# Altium PCB SpeakEasy_Logic.PcbDoc (part 1 of 2)
Units mil, origin at the board's own origin, x right, y up, seen from the top; angles counter-clockwise.
Board outline 3149.61 x 3149.61 mil, 2 copper layers (Top Layer, Bottom Layer), stack 62.8 mil thick; 87 components, 94 nets, 372 pads, 217 vias.
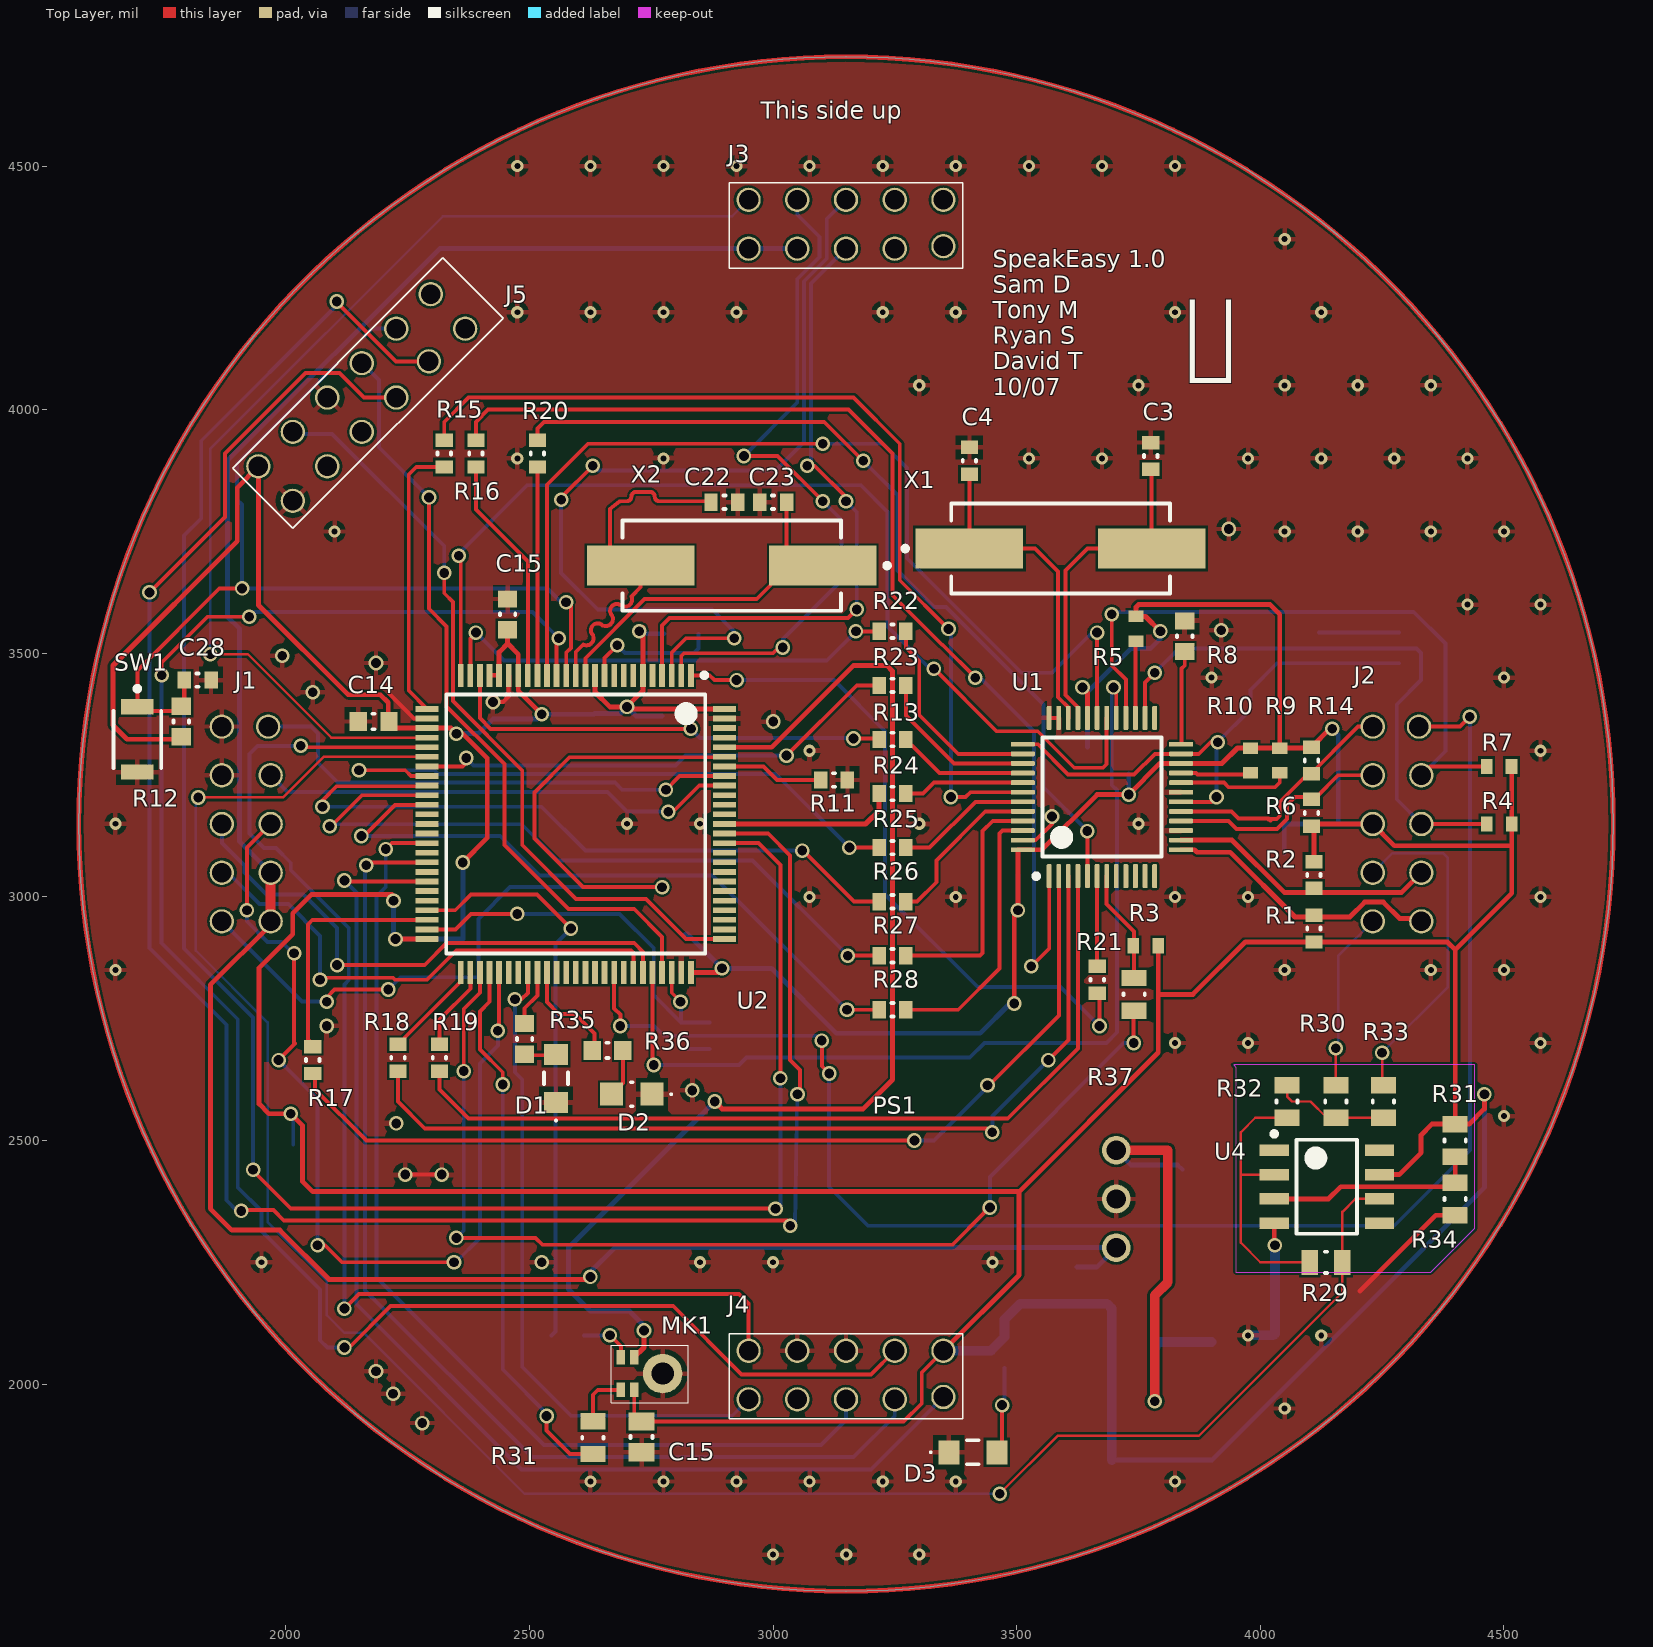
[diagram p0: Top Layer view]
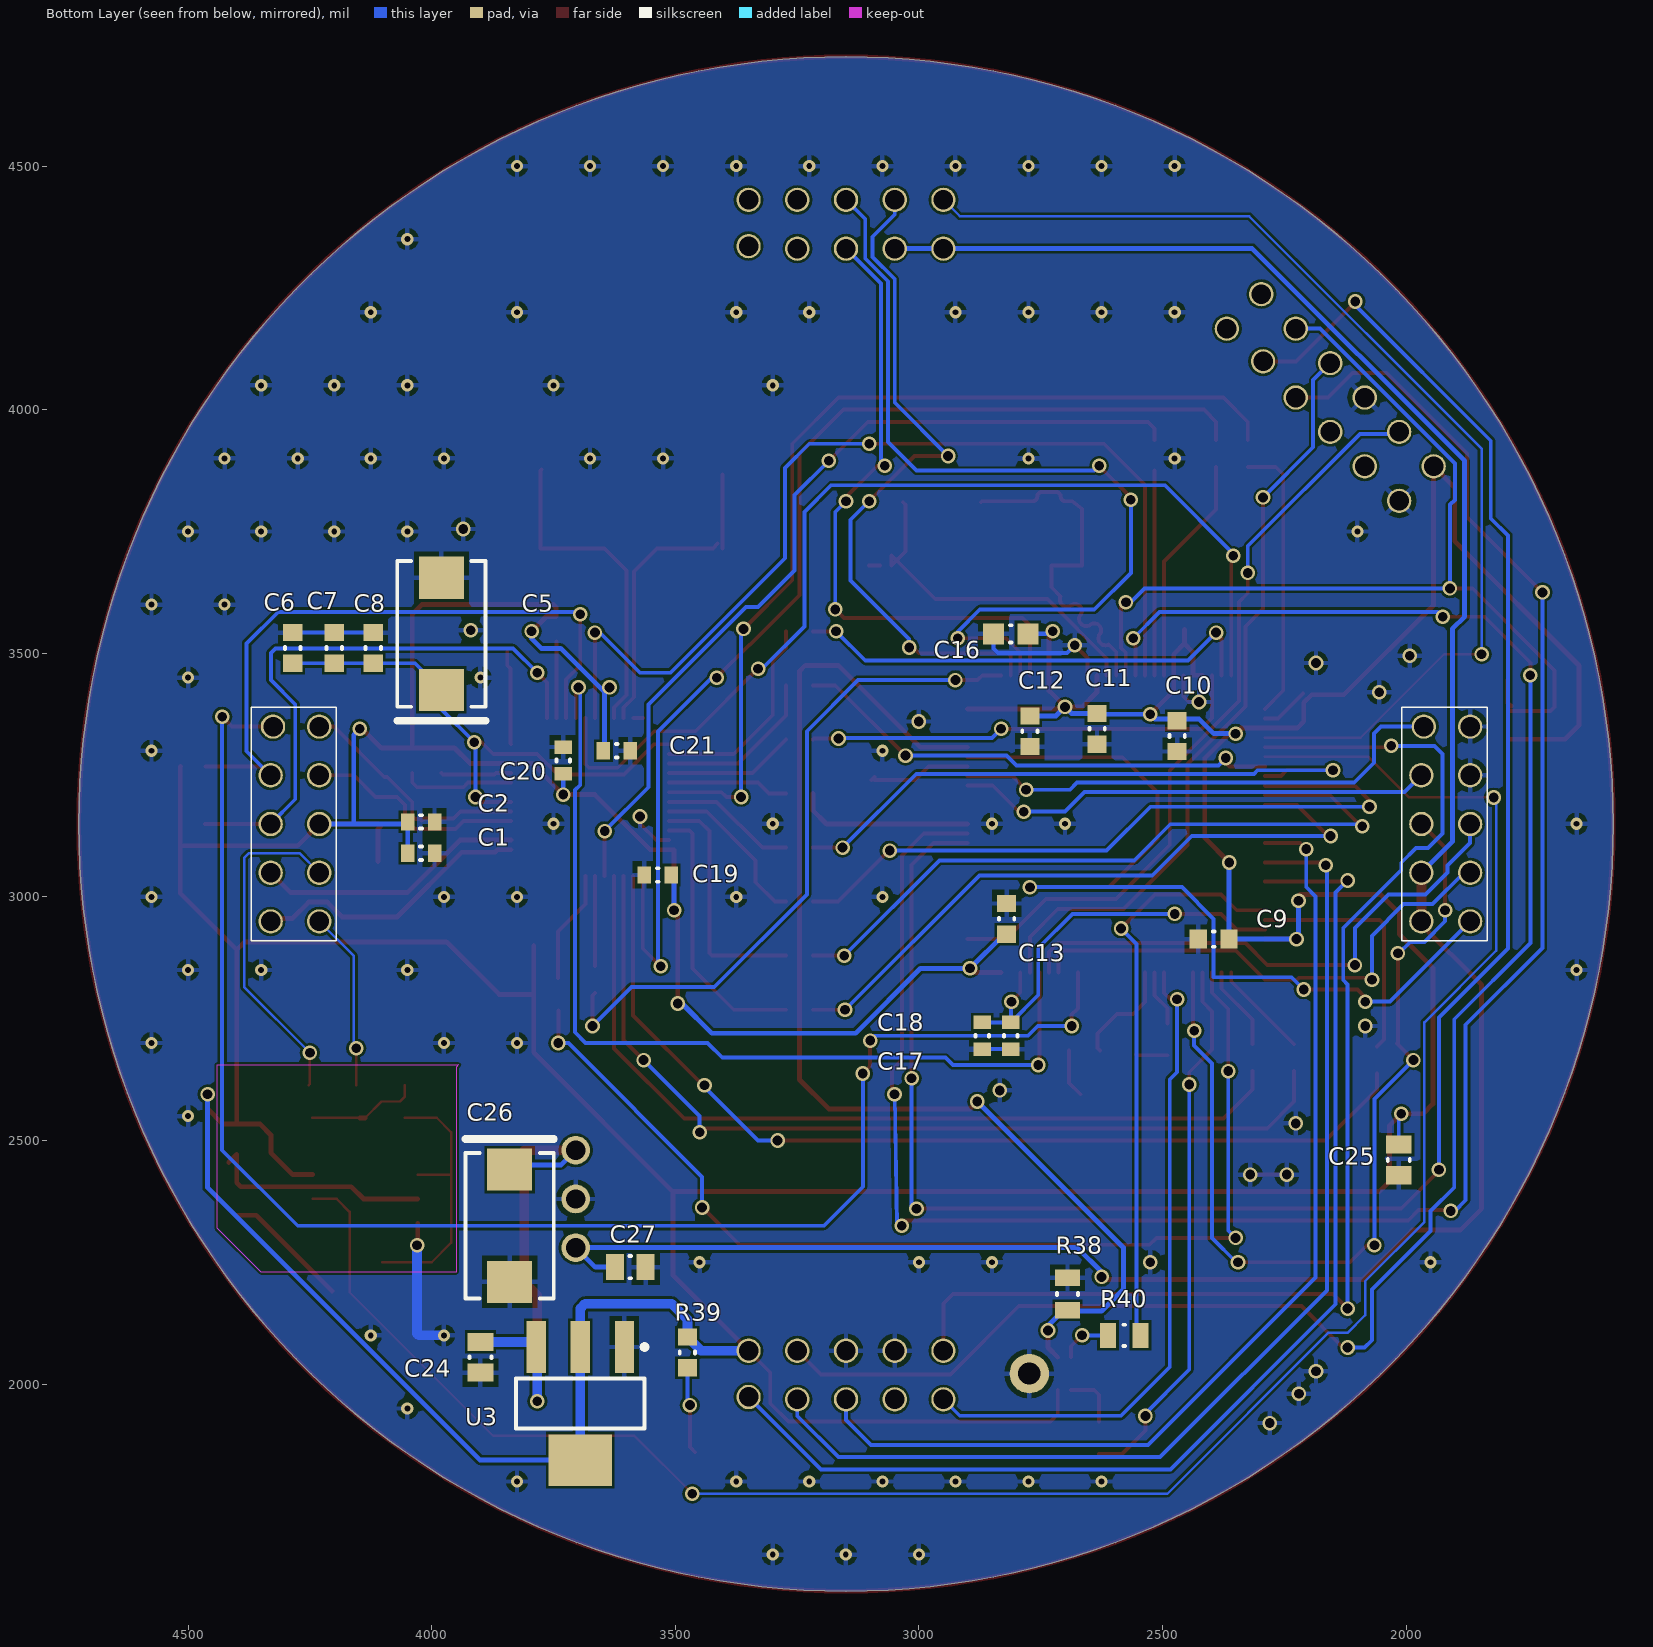
[diagram p1: Bottom Layer view, seen from below]

## Layer stack, top to bottom
Top Solder: solder mask 0.4, Solder Resist, Dk 3.5
Top Layer: signal copper 1.4
Dielectric 1: dielectric 60, FR-4, Dk 4.8
Bottom Layer: signal copper 1.4
Bottom Solder: solder mask 0.4, Solder Resist, Dk 3.5

## Board outline
3149.61,1574.8 cw(c3149.61,3149.61) 1574.8,3149.61 cw(c3149.61,3149.61) 3149.61,4724.41 cw(c3149.61,3149.61) 4724.41,3149.61 cw(c3149.61,3149.61)

## Design rules (kind name [scope] priority, off if disabled: settings)
Clearance [All] p1: gap=5 ignorepadtopadclearanceinfootprint=FALSE except(0: SMDPad-Hole THPad-Hole Via-Hole Fill-Hole Poly-Hole Region-Hole Text-Hole)
DiffPairsRouting [All] p1: maxlimit=10 minlimit=10 mostfreqgap=10 toplayer_minwidth=3.5 toplayer_maxwidth=15 toplayer_prefwidth=15 bottomlayer_minwidth=3.5 bottomlayer_maxwidth=15 bottomlayer_prefwidth=15 maxuncoupledlength=500
HoleSize [All] p1: absolutevalues=TRUE maxlimit=200 minlimit=7.87 maxpercent=80.000 minpercent=20.000
MatchedLengths [InNetClass('Xtal')] p1: tolerance=10 checknetsindiffpair=FALSE checkdiffpairvsdiffpair=TRUE checkxsignals=TRUE checkothers=TRUE
MinimumAnnularRing [All] p1: minimumring=3
MinimumSolderMaskSliver [All] p1: minsoldermaskwidth=1
PolygonConnect [All] p1: connectstyle=Relief reliefconductorwidth=10 reliefentries=4 polygonreliefangle="90 Angle" airgapwidth=10
RoutingVias [All] p1: holewidth=20 width=30 viastyle="Through Hole" minholewidth=8 minwidth=18 maxholewidth=28 maxwidth=50
SilkToSolderMaskClearance [IsPad] p1: minsilkscreentomaskgap=5 clearancetoexposedcopper=TRUE
SolderMaskExpansion [All] p1: expansion=4
Width [All] p1: maxlimit=20 minlimit=3.5 preferedwidth=10 minimp=50.000000 maximp=50.000000 favimp=50.000000
26 further rules are at their usual default settings.

## Classes and differential pairs
net class Xtal: OSC_N OSC_P
component class U_SpeakEasy_Microphone: C15 MK1 R31 R38 R40
differential pair class TX_DIFF: TD
differential pair class "RX Diff": RD
component class Designator: C9 C10 C11 C12 C13 C14 C15 C16 C17 C18 C22 C23 C28 D1 D2 R11 R12 R35 R36 SW1 U2 X2
differential pair TD: +TD_P -TD_N
differential pair RD: +RD_P -RD_N

## Components (designator, comment, footprint, x,y, rotation, side; value= is the part's Value field where it differs from the comment)
C1 "0.1uF" CAPC0603(1608)100_L 4021.69,3089.35 r0 bottom
C2 "0.1uF" CAPC0603(1608)100_L 4021.69,3153.88 r0 bottom
C3 "18pF" CAPC0603(1608)100_L 3775,3905 r270 top
C4 "18pF" CAPC0603(1608)100_L 3402.99,3895 r270 top
C5 "T491D106K035AT" KEMT-T491-D_L 3980,3540 r90 bottom
C6 "CAP 1uF 16V 0603(1608)" CAPC0603(1608)100_N 4285,3510.98 r270 bottom value=1uF
C7 "CAP 1uF 16V 0603(1608)" CAPC0603(1608)100_N 4200,3510.98 r270 bottom value=1uF
C8 "CAP 1uF 16V 0603(1608)" CAPC0603(1608)100_N 4120,3510.98 r270 bottom value=1uF
C9 "CAP 100nF 25V 0603(1608)" CAPC0603(1608)100_N 2395,2913.39 r180 bottom value=100nF
C10 "CAP 100nF 25V 0603(1608)" CAPC0603(1608)100_N 2470,3330 r90 bottom value=100nF
C11 "CAP 100nF 25V 0603(1608)" CAPC0603(1608)100_N 2634.37,3345 r90 bottom value=100nF
C12 "CAP 100nF 25V 0603(1608)" CAPC0603(1608)100_N 2772.17,3340 r90 bottom value=100nF
C13 "CAP 100nF 25V 0603(1608)" CAPC0603(1608)100_N 2820,2955 r270 bottom value=100nF
C14 "CAP 100nF 25V 0603(1608)" CAPC0603(1608)100_N 2180,3360 r0 top value=100nF
C15 "0.1uF" CAPC0805(2012)145_L 2730,1891.5 r90 top
C15 "CAP 100nF 25V 0603(1608)" CAPC0603(1608)100_N 2455,3580 r270 top value=100nF
C16 "CAP 4.7uF 10V 0603(1608)" CAPC0603(1608)100_M 2811.54,3540 r180 bottom value=4.7uF
C17 "CAP 2.2uF 16V 0603(1608)" CAPC0603(1608)55_L 2811.22,2715 r90 bottom value=2.2uF
C18 "CAP 2.2uF 16V 0603(1608)" CAPC0603(1608)55_L 2870,2715 r90 bottom value=2.2uF
C19 "0.1uF" CAPC0603(1608)100_L 3535.79,3045 r180 bottom
C20 "0.1uF" CAPC0603(1608)100_L 3730,3280 r270 bottom
C21 "0.1uF" CAPC0603(1608)100_L 3620,3300 r0 bottom
C22 "18pF" CAPC0603(1608)100_L 2900.12,3810 r180 top
C23 "18pF" CAPC0603(1608)100_L 3000,3810 r0 top
C24 "100nF" CAPC0805(2012)145_L 3900,2055 r90 bottom
C25 "10uF" CAPC0805(2012)145_L 2015,2460 r90 bottom
C26 "T491D106K035AT" KEMT-T491-D_L 3840,2325 r270 bottom
C27 "100nF" CAPC0805(2012)145_L 3592.44,2240 r0 bottom
C28 "1nF" CAPC0603(1608)100_L 1818.78,3445 r180 top
D1 "LTST-C171AKT" LTST-C171AKT_V 2554.29,2627.52 r270 top
D2 "LTST-C170GKT" LTST-C170GKT_V 2710,2595 r0 top
D3 "LTST-C171AKT" LTST-C171AKT_V 3410,1860 r180 top
J1 "Stack Headers" SSW-105 1968.5,3149.61 r90 top locked
J2 "Stack Headers" SSW-105 4330.71,3149.61 r90 top locked
J3 "Stack Headers" TSW-105 3149.61,4330.71 r0 top locked
J4 "Stack Headers" TSW-105 3149.61,1968.5 r0 top locked
J5 "Program-Debug" SSW_Double_Header 2155.71,3954.29 r45 top
MK1 "IM69D120" M69D120 2773.27,2021.54 r0 top
PS1 "TPSM84205" TPSM84205 3704.37,2280 r0 top
R1 "49.9R" RESC0603(1608)_L 4110,2935 r90 top
R2 "49.9R" RESC0603(1608)_L 4110,3045 r270 top
R3 "RC0603JR-072K2L" RESC1608X55X25LL10T15 3765,2900 r0 top
R4 "RC0603JR-072K2L" RESC1608X55X25LL10T15 4490.59,3149.61 r0 top
R5 "RC0603JR-072K2L" RESC1608X55X25LL10T15 3745,3550 r90 top
R6 "49.9R" RESC0603(1608)_L 4105,3172.44 r90 top
R7 "RC0603JR-072K2L" RESC1608X55X25LL10T15 4490,3267.72 r0 top
R8 "4K87 1% 0603(1608)" RESC0603(1608)_N 3845,3535 r90 top value="4870.00 Ohm"
R9 "RC0603JR-072K2L" RESC1608X55X25LL10T15 4040,3280 r90 top
R10 "RC0603JR-072K2L" RESC1608X55X25LL10T15 3980,3280 r90 top
R11 "510R 5% 0603(1608)" RESC0603(1608)_L 3125,3240 r0 top value="510.00 Ohm"
R12 "100K 5% 0603(1608)" RESC0603(1608)_N 1785,3360 r270 top value="100000.00 Ohm"
R13 "49.9R" RESC0603(1608)_L 3245,3323.11 r0 top
R14 "49.9R" RESC0603(1608)_L 4105,3280 r270 top
R15 "49.9R" RESC0603(1608)_L 2325,3910 r90 top
R16 "49.9R" RESC0603(1608)_L 2390,3910 r90 top
R17 "49.9R" RESC0603(1608)_L 2055,2665 r270 top
R18 "49.9R" RESC0603(1608)_L 2230,2670 r270 top
R19 "49.9R" RESC0603(1608)_L 2315,2670 r270 top
R20 "49.9R" RESC0603(1608)_L 2516.26,3910 r90 top
R21 "49.9R" RESC0603(1608)_L 3665.16,2830 r90 top
R22 "49.9R" RESC0603(1608)_L 3245,3545 r0 top
R23 "49.9R" RESC0603(1608)_L 3245,3434.05 r0 top
R24 "49.9R" RESC0603(1608)_L 3245,3212.17 r0 top
R25 "49.9R" RESC0603(1608)_L 3245,3101.22 r0 top
R26 "49.9R" RESC0603(1608)_L 3245,2990.28 r0 top
R27 "49.9R" RESC0603(1608)_L 3245,2879.33 r0 top
R28 "49.9R" RESC0603(1608)_L 3245,2768.39 r0 top
R29 "7K5" RESC0805(2012)_L 4135,2250 r0 top
R30 "5k" RESC0805(2012)_L 4155,2580 r270 top
R31 "100R" RESC0805(2012)_L 2630,1890 r90 top
R31 "20k" RESC0805(2012)_L 4400,2500 r90 top value=20K
R32 "10K" RESC0805(2012)_L 4055,2580 r270 top value=10k
R33 "5k" RESC0805(2012)_L 4252.51,2580 r270 top
R34 "10k" RESC0805(2012)_L 4400,2380 r90 top
R35 "300R 5% 0603(1608)" RESC0603(1608)_N 2490,2708.5 r90 top value="100000.00 Ohm"
R36 "300R 5% 0603(1608)" RESC0603(1608)_N 2660,2685 r180 top value="100000.00 Ohm"
R37 "RES0805" RESC0805(2012)_L 3741.08,2800 r90 top value=0R
R38 "1k" RESC0805(2012)_L 2695,2185 r270 bottom value=1K
R39 "300R 5% 0603(1608)" RESC0603(1608)_N 3475,2065 r90 bottom value="100000.00 Ohm"
R40 "100R" RESC0805(2012)_L 2578.51,2100 r0 bottom
SW1 "B3U-1000P" OMRON-B3U-1000_V 1695,3323.11 r270 top
U1 "DP83848IVVX/NOPB" PT0048A_L 3674.84,3205 r90 top
U2 "STM32F407VGT6U" STM-LQFP100_V 2595,3149.68 r270 top
U3 "LD1117AS33TR" SOT-223_M 3695,1960 r270 bottom
U4 "MC33201D" ONSC-SOIC-8-751-07_V 4136.5,2405 r0 top
X1 "ABLS-25.000MHZ-B4-F-T" ABRA-ABLS2-2_V 3590,3715 r0 top
X2 "ABLS-25.000MHZ-B4-F-T" ABRA-ABLS2-2_V 2915,3680 r180 top

## Footprints (in the part's own frame and the unit in brackets; to place one, negate y for a bottom-side part, rotate by r counter-clockwise, add the part's x,y. Pads: shape width x height; smd on the part's side, far side on the other; paste and mask are expansions set on the pad)
ABRA-ABLS2-2_V [mm] "SMD, 2-Leads, Body 11.4x4.7mm, Height 3.3mm"
  rect 5.6x2.1 smd: 1(-4.75,0) 2(4.75,0)
  silkscreen extent -8.22,-2.35 5.7,2.35, body extent -5.7,-2.35 5.7,2.35, height 3.3
CAPC0603(1608)55_L [mm] "Chip Capacitor, Body 1.6x0.8mm, Height 0.55mm, IPC High Density"
  rect 0.7x0.9 smd: 1(-0.7,0) 2(0.7,0)
  silkscreen extent -0.05,-0.35 0.05,0.35, body extent -0.87,-0.47 0.88,0.48, height 0.55
CAPC0603(1608)100_L [mm]
  rect 0.7x0.9 smd: 1(-0.7,0) 2(0.7,0)
  silkscreen extent -0.05,-0.35 0.05,0.35, body extent -0.87,-0.47 0.88,0.48, height 1
CAPC0603(1608)100_M [mm] "Chip Capacitor, Body 1.6x0.8mm, Height 1.0mm, IPC Low Density"
  rect 1.1x1.1 smd: 1(-0.9,0) 2(0.9,0)
  silkscreen extent -0.05,-0.45 0.05,0.45, body extent -0.87,-0.47 0.88,0.48, height 1
CAPC0603(1608)100_N [mm] "Chip Capacitor, Body 1.6x0.8mm, Height 1.0mm, IPC Medium Density"
  rect 0.9x1 smd: 1(-0.8,0) 2(0.8,0)
  silkscreen extent -0.05,-0.4 0.05,0.4, body extent -0.87,-0.48 0.88,0.47, height 1
CAPC0805(2012)145_L [mm]
  rect 0.95x1.35 smd: 1(-0.8,0) 2(0.8,0)
  silkscreen extent -0.05,-0.58 0.05,0.58, body extent -1.1,-0.72 1.1,0.72, height 1.45
KEMT-T491-D_L [mm] "Molded Capacitor, 2-Leads, Body 7.60x4.60mm, IPC High Density"
  rect 2.2x2.35 smd: 1(-2.925,0) 2(2.925,0)
  silkscreen extent -4.52,-2.3 3.8,2.3, body extent -3.8,-2.3 3.8,2.3, height 3.1
LTST-C170GKT_V [mm]
  rect 1.2x1.2 smd: A(-1.05,0) C(1.05,0)
  silkscreen extent -0.05,-0.63 2.1,0.63, body extent -1,-0.63 1,0.63, height 1.1
LTST-C171AKT_V [mm]
  rect 1.1x1.25 smd: A(-1.25,0) C(1.25,0)
  silkscreen extent -0.3,-0.63 2.25,0.63, body extent -1,-0.63 1,0.63, height 0.8
M69D120 [mm] "MEMS Microphone Package"
  rect 0.45x0.75 smd: 1(-2.18,-0.85) 2(-1.48,-0.85) 3(-2.18,0.85) 4(-1.48,0.85)
  round 2.06 hole 1.16: 5(0,0)
  silkscreen extent -2.67,-1.52 1.33,1.48, body extent -2.64,-1.48 1.12,1.47, height 1.1
OMRON-B3U-1000_V [mm] "SMD, 2-Leads, Body 3x2.5mm"
  rect 0.8x1.7 smd: 1(-1.7,0) 2(1.7,0)
  silkscreen extent -2.77,-1.25 1.5,1.25, body extent -1.5,-1.25 1.5,1.25, height 1.75
ONSC-SOIC-8-751-07_V [mm] "SOIC, 8-Leads, Body 4.9x3.9mm, Pitch 1.27mm"
  rect 1.52x0.6 smd: 1(-2.74,1.905) 2(-2.74,0.635) 3(-2.74,-0.635) 4(-2.74,-1.905) 5(2.74,-1.905) 6(2.74,-0.635) 7(2.74,0.635) 8(2.74,1.905)
  silkscreen extent -2.86,-2.45 1.58,2.88, body extent -1.95,-2.45 1.95,2.45, height 1.75
PT0048A_L [mm] "QFP, 48-Leads, Body 7x7mm, Pitch 0.5mm, IPC High Density"
  rrect40% 1.25x0.25 smd: 1(-4.125,2.75) 2(-4.125,2.25) 3(-4.125,1.75) 4(-4.125,1.25) 5(-4.125,0.75) 6(-4.125,0.25) 7(-4.125,-0.25) 8(-4.125,-0.75) 9(-4.125,-1.25) 10(-4.125,-1.75) 11(-4.125,-2.25) 12(-4.125,-2.75) 25(4.125,-2.75) 26(4.125,-2.25) 27(4.125,-1.75) 28(4.125,-1.25) 29(4.125,-0.75) 30(4.125,-0.25) 31(4.125,0.25) 32(4.125,0.75) 33(4.125,1.25) 34(4.125,1.75) 35(4.125,2.25) 36(4.125,2.75)
  rrect40% 0.25x1.25 smd: 13(-2.75,-4.125) 14(-2.25,-4.125) 15(-1.75,-4.125) 16(-1.25,-4.125) 17(-0.75,-4.125) 18(-0.25,-4.125) 19(0.25,-4.125) 20(0.75,-4.125) 21(1.25,-4.125) 22(1.75,-4.125) 23(2.25,-4.125) 24(2.75,-4.125) 37(2.75,4.125) 38(2.25,4.125) 39(1.75,4.125) 40(1.25,4.125) 41(0.75,4.125) 42(0.25,4.125) 43(-0.25,4.125) 44(-0.75,4.125) 45(-1.25,4.125) 46(-1.75,4.125) 47(-2.25,4.125) 48(-2.75,4.125)
  silkscreen extent -4.25,-3.1 3.1,3.55, body extent -4.51,-4.51 4.51,4.51, height 1.5
RESC0603(1608)_L [mm]
  rect 0.7x0.9 smd: 1(-0.7,0) 2(0.7,0)
  silkscreen extent -0.05,-0.35 0.05,0.35, body extent -0.85,-0.47 0.85,0.47, height 0.6
RESC0603(1608)_N [mm] "Chip Resistor, Body 1.6x0.8mm, IPC Medium Density"
  rect 0.9x1 smd: 1(-0.8,0) 2(0.8,0)
  silkscreen extent -0.05,-0.4 0.05,0.4, body extent -0.85,-0.47 0.85,0.47, height 0.6
RESC0805(2012)_L [mm]
  rect 0.85x1.3 smd: 1(-0.85,0) 2(0.85,0)
  silkscreen extent -0.05,-0.55 0.05,0.55, body extent -1.1,-0.67 1.1,0.68, height 0.7
RESC1608X55X25LL10T15 [mm] "Chip Resistor, 2-Leads, Body 1.60x0.80mm, IPC High Density"
  rect 0.6x0.8 smd: 1(-0.65,0) 2(0.65,0)
  body extent -0.85,-0.45 0.85,0.45, height 0.55
SOT-223_M [mm] "SOT223, 4-Leads, Body 6.5x3.5mm, Pitch 2.3mm, Lead Span 7mm, IPC Low Density"
  rect 2.7x1 smd: 1(-2.95,2.3) 2(-2.95,0) 3(-2.95,-2.3)
  rect 2.7x3.3 smd: 4(2.95,0)
  silkscreen extent -3.07,-3.35 1.3,3.47, body extent -1.85,-3.35 1.85,3.35, height 1.8
SSW-105 [mil] "For use in the stack as the downfacing connection"
  round 50 hole 40: 1(-200,0) 2(-100,0) 3(0,0) 4(100,0) 5(200,5) 6(200,100) 7(100,100) 8(0,100) 9(-100,100) 10(-200,100)
  body extent -260,-49 260,146, height 61
SSW_Double_Header [mil] "For Use with Programming and debug headers"
  round 50 hole 40: 1(-200,0) 2(-100,0) 3(0,0) 4(100,0) 5(200,5) 6(300,0) 7(300,100) 8(200,100) 9(100,100) 10(0,100) 11(-100,100) 12(-200,100)
  silkscreen extent -240,-40 370,135, body extent -265,-13 355,490, height 198
STM-LQFP100_V [mm] "Thin QFP, 100-Leads, Body 14x14mm, Pitch 0.5mm, ST Recommended"
  rect 1.2x0.3 smd: 1(-7.75,6) 2(-7.75,5.5) 3(-7.75,5) 4(-7.75,4.5) 5(-7.75,4) 6(-7.75,3.5) 7(-7.75,3) 8(-7.75,2.5) 9(-7.75,2) 10(-7.75,1.5) 11(-7.75,1) 12(-7.75,0.5) 13(-7.75,0) 14(-7.75,-0.5) 15(-7.75,-1) 16(-7.75,-1.5) 17(-7.75,-2) 18(-7.75,-2.5) 19(-7.75,-3) 20(-7.75,-3.5) 21(-7.75,-4) 22(-7.75,-4.5) 23(-7.75,-5) 24(-7.75,-5.5) 25(-7.75,-6) 51(7.75,-6) 52(7.75,-5.5) 53(7.75,-5) 54(7.75,-4.5) 55(7.75,-4) 56(7.75,-3.5) 57(7.75,-3) 58(7.75,-2.5) 59(7.75,-2) 60(7.75,-1.5) 61(7.75,-1) 62(7.75,-0.5) 63(7.75,0) 64(7.75,0.5) 65(7.75,1) 66(7.75,1.5) 67(7.75,2) 68(7.75,2.5) 69(7.75,3) 70(7.75,3.5) 71(7.75,4) 72(7.75,4.5) 73(7.75,5) 74(7.75,5.5) 75(7.75,6)
  rect 0.3x1.2 smd: 26(-6,-7.75) 27(-5.5,-7.75) 28(-5,-7.75) 29(-4.5,-7.75) 30(-4,-7.75) 31(-3.5,-7.75) 32(-3,-7.75) 33(-2.5,-7.75) 34(-2,-7.75) 35(-1.5,-7.75) 36(-1,-7.75) 37(-0.5,-7.75) 38(0,-7.75) 39(0.5,-7.75) 40(1,-7.75) 41(1.5,-7.75) 42(2,-7.75) 43(2.5,-7.75) 44(3,-7.75) 45(3.5,-7.75) 46(4,-7.75) 47(4.5,-7.75) 48(5,-7.75) 49(5.5,-7.75) 50(6,-7.75) 76(6,7.75) 77(5.5,7.75) 78(5,7.75) 79(4.5,7.75) 80(4,7.75) 81(3.5,7.75) 82(3,7.75) 83(2.5,7.75) 84(2,7.75) 85(1.5,7.75) 86(1,7.75) 87(0.5,7.75) 88(0,7.75) 89(-0.5,7.75) 90(-1,7.75) 91(-1.5,7.75) 92(-2,7.75) 93(-2.5,7.75) 94(-3,7.75) 95(-3.5,7.75) 96(-4,7.75) 97(-4.5,7.75) 98(-5,7.75) 99(-5.5,7.75) 100(-6,7.75)
  silkscreen extent -7.87,-6.75 6.75,6.83, body extent -7,-7 7,7, height 1.6
TPSM84205 [mm] "Footpring combo of TPSM84205 and SSW"
  round 1.5 hole 1: 1(0,0) 2(0,2.54) 3(0,5.08)
  body extent -21.83,-2.73 0.33,7.37, height 8.8
TSW-105 [mil] "For use in the stack as the upfacing connection"
  round 50 hole 40: 1(-200,0) 2(-100,0) 3(0,0) 4(100,0) 5(200,5) 6(200,100) 7(100,100) 8(0,100) 9(-100,100) 10(-200,100)
  silkscreen extent -240,-40 240,135, body extent -250,-50 250,150, height 330

## Part data
C1 C2 C3 C4 C19 C20 C21 C22 C23 C28: library part CMP-1590-00005-1, "0603 (1608 Metric) Chip Capacitor", Case-EIA=0603, Case-Metric=1608, PackageReference=CAPC0603(1608)100
C5 C26: library part CMP-2000-07580-1, "Tantalum Capacitor, 10 uF, +/- 10%, 35 V, -55 to 125 degC, 2-Pin SMD, RoHS, Tape and Reel", Capacitance=10uF, Case\/Package=2917, Case Code (Metric)=7343, Dielectric Material=Tantalum, ESR (Equivalent Series Resistance)=1Ohm, Leakage Current=3.5uA, Manufacturer=Kemet, Max Operating Temperature=125degC, Min Operating Temperature=-55degC, Package Description="2-Pin Surface Mount Device, Body 7.3 x 4.3 mm", Package Quantity=1, Package Reference=T491-D, Tolerance=20%, Voltage=35V, Case Code (Imperial)=2917, Datasheet URL=http://www.kemet.com/Lists/ProductCatalog/Attachments/254/KEM_T2005_T491.pdf, Datasheet Version=07/2017, Depth=4.3mm, Dissipation Factor=6%, Height=2.8mm, Height - Seated (Max)=0.122inch, Lead Free=LeadFree, Length=7.3mm, Life (Hours)=2000Hour, Manufacturer URL=http://www.kemet.com/, Mount=PCB, Mounting Technology=SurfaceMount, Number of Pins=2, Packaging=TapeandReel, Polarity=Polar, Radiation Hardening=No, REACH SVHC=NoSVHC, RoHSCompliant=True, Termination=SMD/SMT, Voltage Rating=35V, Voltage Rating (DC)=35V, Width=4.3mm
C6 C7 C8: library part CMP-1035-02736-1, "CAP 1uF 16V ±5% 0603 (1608 Metric) Thickness 1mm SMD", Case-EIA=0603, Case-Metric=1608, Rated Voltage="16 V", Tolerance=±5%, Max Thickness="1 mm", Technology=SMT
C9 C10 C11 C12 C13 C14 C15: library part CMP-1035-02589-1, "CAP 100nF 25V ±20% 0603 (1608 Metric) Thickness 1mm SMD", Case-EIA=0603, Case-Metric=1608, Rated Voltage="25 V", Tolerance=±20%, Max Thickness="1 mm", Technology=SMT
C15 C24 C25 C27: library part CMP-1590-00003-1, "0805 (2012 Metric) Chip Capacitor", Case-EIA=0805, Case-Metric=2012, PackageReference=CAPC0805(2012)145
C16: library part CMP-1035-02787-1, "CAP 4.7uF 10V ±20% 0603 (1608 Metric) Thickness 1mm SMD", Case-EIA=0603, Case-Metric=1608, Rated Voltage="10 V", Tolerance=±20%, Max Thickness="1 mm", Technology=SMT
C17 C18: library part CMP-1035-02764-1, "CAP 2.2uF 16V ±20% 0603 (1608 Metric) Thickness 0.55mm SMD", Case-EIA=0603, Case-Metric=1608, Rated Voltage="16 V", Tolerance=±20%, Max Thickness="0.55 mm", Technology=SMT
D1 D3: library part CMP-1674-00004-3, "LED AMBER CLR THIN 0805 SMD", Manufacturer=Lite-On, ComponentLink1Description=Datasheet, ComponentLink1URL=http://optoelectronics.liteon.com/upload/download/DS-22-99-0170/S_110_LTST-C171AKT.pdf, PackageReference=C171AKT, PartNumber=LTST-C171AKT
D2: library part CMP-1674-00002-2, "LED GREEN CLEAR 0805 SMD", ComponentLink1Description=Datasheet, ComponentLink1URL=http://media.digikey.com/pdf/Data%20Sheets/Lite-On%20PDFs/LTST-C170GKT.pdf, PackageReference=C170GKT, PartNumber=LTST-C170GKT
MK1: "High Performance MEMS microphone utilizing PDM", ComponentLink1Description=Datasheet, ComponentLink1URL=https://www.infineon.com/dgdl/Infineon-IM69D120-DS-v01_00-EN.pdf?fileId=5546d462602a9dc801607a0e41a01a2b
PS1: library part tpsm84205
R1 R2 R6 R13 R14 R15 R16 R17 R18 R19 R20 R21 R22 R23 R24 R25 R26 R27 R28: library part CMP-1591-00001-1, "0603 (1608 Metric) Chip Resistor", Case-EIA=0603, Case-Metric=1608, PackageReference=RESC0603(1608)
R3 R4 R5 R7 R9 R10: library part CMP-2000-06957-1, "Chip Resistor, 2.2 KOhm, +/- 5%, 0.1 W, -55 to 155 degC, 0603 (1608 Metric), RoHS, Tape and Reel", Case Code - in=0603, Case Code - mm=1608, Manufacturer=Yageo, Operating Temperature Range=-55Cto+155C, Package Description="2-Pin Surface Mount Device, Body 1.6 x 0.8 mm", Power Rating=100mW, Resistance=2.2kOhms, Temperature coefficient=100PPM/C, Tolerance=5%, Voltage Rating=50V, Datasheet URL=http://www.yageo.com/documents/recent/PYu-RC_Group_51_RoHS_L_7.pdf, Datasheet Version="Rev. 7, 05/2017", Manufacturer URL=http://www.yageo.com/, Mounting Technology=SurfaceMount, Package Reference=0603, Packaging=Reel, Product=ThickFilmResistorsGeneralPurpose, Series=RC, Termination Style=SMD/SMT
R8: library part CMP-1012-00588-1, "4K87 0.1W 1% 0603 (1608 Metric)  SMD", Case-EIA=0603, Case-Metric=1608, Power="0.1 W", Tolerance="1 %", Technology=SMT
R11: library part CMP-1012-00067-1, "510R 0.1W 5% 0603 (1608 Metric)  SMD", Case-EIA=0603, Case-Metric=1608, Power="0.1 W", Tolerance="5 %", Technology=SMT
R12 R35 R36 R39: library part CMP-1012-00122-1, "100K 0.1W 5% 0603 (1608 Metric)  SMD", Case-EIA=0603, Case-Metric=1608, Power="0.1 W", Tolerance="5 %", Technology=SMT
R29 R30 R31 R31 R32 R33 R34 R37 R38 R40: library part CMP-1591-00002-1, "0805 (2012 Metric) Chip Resistor", Case-EIA=0805, Case-Metric=2012, PackageReference=RESC0805(2012)
SW1: library part CMP-2100-03586-1, "Ultra-Small Tactile Switch, 0.05 A, 12 V, -25 to 70 degC, 2-Pin SMD, RoHS, Tape and Reel", Case/Package=SMD/SMT, Contact Current Rating=50mA, Insulation Resistance=100MOhm, Manufacturer="Omron Electronic Components", Max Operating Temperature=70degC, Min Operating Temperature=-25degC, Operating Force=1.5N, Package Description="2-Pin Surface Mount Device, Body 3 x 2.5 mm", Package Quantity=1, Package Reference=B3U-1000, Voltage Rating (DC)=12V, Actuator Length=0.4mm, Contact Material=Silver, Current Rating=50mA, Datasheet URL=http://www.omron.com/ecb/products/pdf/en-b3u.pdf, Datasheet Version=42005.0, Depth=2.5mm, Electrical Life=200000Cycles, Height=1.2mm, Illumination Type=Illuminated, Lead Free=LeadFree, Length=4mm, Manufacturer URL=http://www.omron.com/, Max Current Rating=50mA, Mount=SurfaceMount, Orientation=Straight, Packaging=TapeandReel, REACH SVHC=Unknown, RoHSCompliant=true, Switch Travel=0.15mm, Termination=SMD/SMT, Throw Configuration=SPST, Weight=0.022g, Width=3mm
U1: library part CMP-0058-01357-3, "PHYTER® Industrial Temperature Single Port 10/100 Mb/s Ethernet Physical Layer Transceiver, 48-pin LQFP, Pb-Free, 1000 Reel", Manufacturer="Texas Instruments", PackageTopMarking=NSUZXYTT*DP83848VV*VBI, PowerWise=N, ComponentLink1Description="Datasheet URL", ComponentLink1URL=http://www.ti.com/general/docs/lit/getliterature.tsp?genericPartNumber=DP83848I&fileType=pdf, CompType="Interface IC", High-Reliability=Y, PackageDescription="LQFP, 7 x 7 x 1.4mm, 48 Lead, 0.5mm Pitch", PackageReference=PT0048A, PartNumber=DP83848IVVX/NOPB, PinCount=48, RoHS=Y
U2: library part CMP-0243-00032-2, "ARM Cortex-M4 32-bit MCU+FPU, 210 DMIPS, 1024 kB Flash, 192 kB Internal RAM, 82 I/Os, 100-pin LQFP, -40 to 85 degC, Tray", I/Os (High Current)=82, Manufacturer=STMicroelectronics, Operating Frequency(F) (Processor speed) (MHz)=168, Supply Voltage(Vcc) max (V)=3.6, Supply Voltage(Vcc) min (V)=1.8, ComponentLink1Description="Manufacturer URL", ComponentLink1URL=http://www.st.com/web/en/home.html, ComponentLink2Description=Datasheet, ComponentLink2URL=http://www.st.com/st-web-ui/static/active/en/resource/technical/document/datasheet/DM00037051.pdf, ComponentLink3Description="Package Specification", ComponentLink3URL=http://www.st.com/st-web-ui/static/active/en/resource/technical/document/data_brief/DM00071938.pdf, Core="ARM Cortex-M4", D/A Converter=2x12-bit, DatasheetVersion="Rev. 4", FLASH Size (Prog) (kB)=1024, Internal RAM Size (kB)=192, Mounting Technology="Surface Mount", PackageDescription="100-Pin Low Profile Quad Flat Package, 14 x 14 mm Body, 0.5 mm Pitch", PackageReference=LQFP100, PackageVersion="Rev. 1, 06/2013", Packing=Tray, PartId=1, PartNumber=STM32F407VGT6U
U3: library part CMP-0244-00316-1, "1A, Low Drop Positive Voltage Regulator, 3.3V, 4-Pin SOT-223, Tape and Reel", ComponentLink1Description="Manufacturer URL", ComponentLink1URL=http://www.st.com, ComponentLink2Description=Datasheet, ComponentLink2URL=http://www.st.com/internet/com/TECHNICAL_RESOURCES/TECHNICAL_LITERATURE/DATASHEET/CD00002116.pdf, DatasheetVersion=2/12/2011, PackageDescription="4-Pin SOT-223 Package, 6.5 x 3.5 mm Body, 2.3 mm Pitch, 7 mm Lead Span", PackageReference=SOT-223, PackageVersion=2010
U4: library part CMP-1310-00330-1, "Low Voltage, Rail-to-Rail Operational Amplifier, 1.8 to 12 V, -40 to 105 degC, 8-Pin SOIC, Tube", Manufacturer="On Semiconductor", ComponentLink1Description="Manufacturer URL", ComponentLink1URL=http://www.onsemi.com/, ComponentLink2Description=Datasheet, ComponentLink2URL=http://www.onsemi.cn/pub_link/Collateral/MC33201-D.PDF, ComponentLink3Description="Package Specification", ComponentLink3URL=http://www.onsemi.com/pub_link/Collateral/751-07.PDF, DatasheetVersion="Rev. 17", GBW Typ (MHz)=2.2, Mounting Technology="Surface Mount", PackageDescription="8-Pin Small Outline Integrated Circuit, Body 4.9 x 3.9 mm, Pitch 1.27 mm", PackageReference=SOIC-8-751-07, PackageVersion="Rev. AK, 02/2011", Packing=Tube, PartId=1, PartNumber=MC33201D, RoHS=FALSE, SR Typ (V/uS)=1, VCC Max (V)=12, VCC Min (V)=1.8
X1 X2: library part CMP-0277-00002-1, "Low Profile Surface Mount Microprocessor Crystal, 25 MHz +/-30 ppm, 180 Ohm, -40 to 85 degC, 2-Pin 11.4 x 4.7 x 3.3 mm SMD, RoHS, Tape and Reel", Freq. Stability="+/- 30 ppm", Frequency="4.096 MHz", Load Capacitance="18 pF", Manufacturer=Abracon, Operating Temp. Range="-40 to 85 degC", PartNumber=ABLS2-4.096MHZ-D4Y-T, Shunt Capacitance="7 pF Max.", ComponentLink1Description="Manufacturer URL", ComponentLink1URL=http://www.abracon.com/, ComponentLink2Description=Datasheet, ComponentLink2URL=http://www.abracon.com/Resonators/ABLS2.pdf, DatasheetVersion="Rev. 03.31.11", ESR="180 Ohm", Freq. Tolerance="+/- 30 ppm", Mounting Technology="Surface Mount", Operation Mode="Fundamental or 3rd Overtone", PackageDescription="2-Pin SMD, Body 11.4 x 4.7 mm, Height 3.3 mm", PackageReference=ABLS2-2, Packing="Tape and Reel", RoHS=TRUE
J1 J2 J3 J4: System=Connector

## Via types
v1: diameter 30, hole 20, Top Layer to Bottom Layer, 139 vias
v2: diameter 25, hole 12, Top Layer to Bottom Layer, 78 vias

## Nets (pads, with @x,y where several pads share a name; then routed paths per layer and width w, separated by ;. In a path a pad name is that pad's centre, name@x,y a point inside that pad or via, vN(x,y) a via of type N, cw(c..) or ccw(c..) an arc to the next point about the centre after c; other vN are vias at no path point)
+3V3: C1.2 C2.2 C9.2 C10.2 C11.2 C12.2 C13.2 C14.2 C15.2 C16.2 C19.2 C20.2 C21.2 C25.2 J2.8 J4.6 J5.12 MK1.2 R1.1 R2.1 R3.2 R4.2 R5.2 R6.1 R7.2 R9.2 R10.2 R12.2 R14.1 R31.2@4400,2533.46 R39.2 U1.22 U1.32 U1.48 U2.6 U2.11 U2.19 U2.21 U2.22 U2.28 U2.50 U2.75 U2.100 U3.2 U3.4 U4.7 | length 15651.1
  Top Layer w8: MK1.2 2715,1937.99 2730,1922.99 3267.99,1922.99 3305,1960 3305,2023.9 J4.6
  Top Layer w10: R12.2@1785,3323.5 1673.9,3323.5 1645,3352.4 1645,3475 1900,3730 1900,3840 J5.12 1943.58,3599.18 2127.76,3415 2194.03,3415 2210,3399.03 2210,3360 2223.46,3346.54 U2.28 2338.46,3346.54 v1(2350,3335) 2362.98,3335 2413.21,3284.77 2413.21,3120.97 v1(2362.8,3070.55) ; v1(2220.82,2992.2) 2220.82,3001.86 2217.93,3004.75 2052.23,3004.75 2014,2966.52 2014,2923.44 1945,2854.45 1945,2575 1965,2555 v1(2010,2555) 2033.86,2531.14 2033.86,2416.14 2055,2395 3505,2395 ; v1(2225,2913.39) 2289.8,2913.39 U2.50 ; U2.22 U2.21 2437.52,3502.52 2455,3520 ; C15.2@2455,3548.5 2455,3520 ; v1(2525,3375) 2476.89,3423.11 U2.19 2476.89,3498.11 2455,3520 ; U2.11 2634.37,3420.63 2665,3390 v1(2700,3390) ; v1(2725,3545.43) 2732.8,3553.23 U2.6 2732.8,3422.8 v1(2700,3390) ; U2.75 2886.18,2844.57 v1(2895,2853.39) ; U2.100 2704.09,3385.91 v1(2700,3390) ; J4.6 3505,2223.9 3505,2395 ; v1(3495,2781.14) 3495,2965 v1(3502.44,2972.44) 3502.44,3096.73 U1.48 3551.73,3096.73 3665,3210 v1(3730,3210) 3793.9,3273.9 U1.22 3921.42,3273.9 3953.11,3305.59 R10.2 R9.2 ; v1(3635,3430) 3645.31,3419.69 U1.32 ; 3790.59,2799.41 3790.59,2680.59 3505,2395 ; R3.2 3790.59,2800 3861.65,2800 3969.09,2907.44 R1.1 4383.98,2907.44 4400,2891.42 ; v1(3795,3545) 3764.41,3575.59 R5.2 3745,3595 3750,3600 4020,3600 4040,3580 R9.2 ; R2.1 4110,3139.88 R6.1 4109.72,3149.61 J2.8 4275.31,3105 4516.18,3105 ; v1(4147.56,3345) 4142.44,3345 R14.1 4103.03,3305.59 R9.2 ; U4.7 4285,2430 4330,2475 4330,2511.18 4352.28,2533.46 R31.2@4400,2533.46 ; v1(4460,2595) 4460,2565 4428.46,2533.46 R31.2@4400,2533.46 ; R7.2 4516.18,3267.13 R4.2 4516.18,3105 ; R31.2@4400,2533.46 4400,2891.42 ; 4400,2891.42 4516.18,3007.6 4516.18,3105
  Bottom Layer w8: v1(2010,2555) 2015,2550 C25.2
  Bottom Layer w10: v1(2220.82,2992.2) 2220.82,2925.24 2228.84,2917.23 v1(2225,2913.39) C9.2 2363.5,3071.26 v1(2362.8,3070.55) ; v1(2350,3335) 2394.57,3335 2424.57,3365 2515,3365 v1(2525,3375) 2632.87,3375 C11.2 2686.5,3376.5 v1(2700,3390) 2718.5,3371.5 C12.2 ; v1(2725,3545.43) 2730.43,3540 C16.2 ; C13.2 2824.88,2923.5 v1(2895,2853.39) 2996.61,2853.39 3130,2720 3425,2720 3486.14,2781.14 v1(3495,2781.14) ; v1(3502.44,2972.44) C19.2@3502.44,3045 ; v1(3635,3430) v1@3645,3420 ; C21.2@3645,3307.56 v1@3645,3420 ; U3.4 3900.68,1843.86 4460,2403.18 v1(4460,2595) ; v1(3730,3210) C20.2 ; v1(3795,3545) 3795,3530 3775,3510 3735,3510 v1@3645,3420 ; C1.2 C2.2 4053.52,3149.61 4160,3149.61 ; v1(4147.56,3345) 4160,3332.56 4160,3149.61 ; J2.8 4160,3149.61
  Bottom Layer w20: J4.6 3447.01,2068.5 R39.2 3475,2132.56 3507.44,2165 3685,2165 3695,2155 U3.2 U3.4
+12V: C27.2 J1.1 J1.2 J3.1 J3.2 PS1.1 | length 5024.9
  Top Layer w10: J1.1 1971.83,2946.28 1845,2819.45 1845,2360 1889,2316 1987.5,2316 2088.5,2215 2620,2215 v1(2625,2220)
  Top Layer w20: J1.1 J1.2
  Bottom Layer w10: J1.2 1905,3113.11 1905,3550 1880,3575 1880,3895 2315.71,4330.71 J3.1 J3.2 ; v1(2625,2220) 2625,2230 2675,2280 PS1.1 3664.37,2240 C27.2
ADC_HIGH_MID: J4.10 U2.30 | length 2559.8
  Top Layer w8: v1@2030.39,3307.17 U2.30 ; v1(2120,2155) 2150,2185 2930,2185 2949.61,2165.39 J4.10
  Bottom Layer w8: v1(2030.39,3310) 1942.01,3310 1925,3292.99 1925,3130 1955,3100 1980,3100 2010,3070 2010,3055 2129,2936 2129,2829 2120,2820 v1(2120,2155)
ADC_LOW: J4.7 U2.15 | length 3782.9
  Top Layer w8: v1(1745,3454.8) 1745,3480.55 1839.45,3575 v1(1925,3575) ; v1(2120,2075) 2130,2075 2215,2160 2795,2160 2935,2020 3201.1,2020 J4.7 ; U2.15 2555.63,3526.57 v1(2560,3530.95)
  Bottom Layer w8: v1(1745,3454.8) 1745,2905 1901.16,2748.84 1901.16,2403.84 1949.5,2355.5 1949.5,2314.49 2070,2194 2070,2090 2085,2075 v1(2120,2075) ; v1(1925,3575) 1935,3585 2505.95,3585 v1(2560,3530.95)
AUX_L: J2.10 R30.1 | length 367.5
  Top Layer w5: R30.1 v1(4155,2689.21)
  Bottom Layer w5: v1(4155,2689.21) 4159.61,2693.82 4159.61,2878.5 J2.10
AUX_R: J2.9 R33.1 | length 698.7
  Top Layer w5: v1(4250,2680) 4250,2615.98 R33.1
  Bottom Layer w5: J2.9 4271.1,3090 4375,3090 4385,3080 4385,2815 v1(4250,2680)
Button_VD: J1.9 U2.69 | length 1059
  Top Layer w8: v1(2070,2830) 2074,2834 2219.94,2834 2223.94,2830 2289.69,2830 2349.69,2890 2708.11,2890 2713.11,2885 U2.69
  Bottom Layer w8: J1.9 1881.39,3049.61 1946,2985 2005,2985 2070,2920 v1(2070,2830)
Button_VU: J1.8 U2.70 | length 1128.7
  Top Layer w8: v1(2105,2860) 2285,2860 2330,2905 2715,2905 2732.8,2887.2 U2.70
  Bottom Layer w8: J1.8 1868.5,3110.72 1915,3064.22 1915,3050 1960,3005 2036.34,3005 2105,2936.34 v1(2105,2860)
COL: R15.2 U1.42 | length 1952.7
  Top Layer w8: R15.2 2325,3975 2375,4025 3165,4025 3260,3930 3260,3650 v1(3360,3550) ; v1(3365,3205) 3395,3205 3404.84,3214.84 U1.42 U1.42@3512.6,3214.84
  Bottom Layer w8: v1(3360,3550) 3365,3545 v1(3365,3205)
CRS: R13.2 U1.40 | length 268.6
  Top Layer w8: R13.2 3341.46,3254.21 U1.40@3512.6,3254.21
GAIN0: J3.9 U2.2 | length 1429.9
  Top Layer w8: U2.2 2811.54,3494.06 2817.48,3500 3000,3500 3011.89,3511.89 v1(3020,3511.89) ; v1(2940,3905) 3009.02,3905 v1(3102.01,3812.01)
  Bottom Layer w8: v1(2940,3905) 3049.61,4014.61 3049.61,4267.99 3095,4313.38 3095,4355 3049.61,4400.39 J3.9 ; v1(3020,3511.89) 3020,3529.41 3140,3649.41 3140,3774.02 v1(3102.01,3812.01)
GAIN1: J3.8 U2.3 | length 1847.5
  Top Layer w8: v1(2565,3815) 2565,3820 v1(2630,3885) ; U2.3 2791.85,3501.85 2820.95,3530.95 v1(2920,3530.95)
  Bottom Layer w8: v1(2565,3815) 2565,3665 2640,3590 2875,3590 2920,3545 v1(2920,3530.95) ; v1(2630,3885) 2640,3875 3004.61,3875 3063.69,3934.08 3063.69,4263.69 3110,4310 3110,4391.1 J3.8
GND: C1.1 C2.1 C3.1 C4.1 C5.2 C6.1 C7.1 C8.1 C9.1 C10.1 C11.1 C12.1 C13.1 C14.1 C15.1 C16.1 C17.1 C18.1 C19.1 C20.1 C21.1 C22.1 C23.1 C24.1 C25.1 C26.2 C27.1 C28.1 D1.C D2.C D3.C J1.6 J1.7 J4.8 J4.9 J5.1 J5.10 MK1.5 PS1.2 R8.2 R11.2 R34.1 R38.1 SW1.2 U1.15 U1.19 U1.35 U1.36 U1.47 U2.10 U2.20 U2.27 U2.74 U2.99 U3.1 U4.4 | length 1418
  Top Layer w8: 2211.29,3417.54 2262.61,3366.22 U2.27 ; v1(2245,2430) v1(2320,2430) ; v1(2425,3400) 2445.87,3400 2457.2,3411.34 U2.20 ; U2.10 2654.06,3490.36 v1(2680,3516.31) ; U1.47 3539.15,3116.42 3572.52,3149.78 v1(3572.52,3165) ; U1.36 U1.35
  Top Layer w10: U4.4 4028.62,2286.38 v1(4030,2285) ; 4204.37,2190.91 4360,2346.54 R34.1
  Bottom Layer w8: v1(2680,3516.31) 2695.63,3500.67 2837.56,3500.67 2846.97,3510.08 C16.1 ; C17.1 C18.1 ; C8.1 C7.1 C6.1
  Bottom Layer w10: v1@4025,2280 v1(4030,2285)
  Bottom Layer w20: v2(3975,2100) 4026.53,2100 4030,2103.47 v1(4030,2285)
  other v1: 2280,1920 2220,1980 2185,2026.54 2525,2250 2226.42,2535 2833.94,2602.8 2084,2735 3000.52,3360 2055,3420 2185,3480 1992.42,3495 3920,3547.48 3935,3755
  other v2: 3000,1650 3150,1650 3300,1650 2625,1800 2775,1800 2925,1800 3075,1800 3225,1800 3375,1800 3825,1800 4050,1950 4125,2100 1950,2250 2850,2250 3000,2250 3450,2250 4500,2550 3825,2700 3975,2700 4575,2700 1650,2850 4050,2850 4350,2850 4500,2850 3075,3000 3375,3000 3825,3000 3975,3000 4575,3000 1650,3150 2700,3150 2850,3150 3300,3150 3750,3150 3075,3300 4575,3300 3900,3450 4500,3450 4425,3600 4575,3600 2100,3750 4050,3750 4200,3750 4350,3750 4500,3750 2475,3900 2775,3900 3525,3900 3675,3900 3975,3900 4125,3900 4275,3900 4425,3900 3300,4050 3750,4050 4050,4050 4200,4050 4350,4050 2475,4200 2625,4200 2775,4200 2925,4200 3225,4200 3375,4200 3825,4200 4125,4200 4050,4350 2475,4500 2625,4500 2775,4500 2925,4500 3075,4500 3225,4500 3375,4500 3525,4500 3675,4500 3825,4500
GPIO_IN3: U1.29 U2.71 | length 1954.2
  Top Layer w8: U2.71 2752.48,2657.52 v1(2755,2655) ; v1(3698.74,3430) v1@3704.37,3435.63 ; U1.29 v1@3704.37,3430
  Bottom Layer w8: v1(2755,2655) 2930,2655 2945,2670 3403.58,2670 3433.58,2700 3683.9,2700 3706,2722.1 3706,3219.94 ; v1(3698.74,3430) 3695,3426.26 3695,3230 3705.53,3219.47
I2C1_SCL: J1.4 U2.92 | length 984.6
  Top Layer w8: v1(2785,3175) 2795,3175 2848.43,3228.43 U2.92
  Bottom Layer w8: J1.4 2003.11,3215 2660,3215 2700,3175 v1(2785,3175)
I2C1_SDA: J1.5 U2.93 | length 1037.3
  Top Layer w8: v1(2780,3220) 2808.11,3248.11 U2.93
  Bottom Layer w8: J1.5 2051.61,3349.61 2065.5,3335.72 2065.5,3275.34 2106.34,3234.5 2675.5,3234.5 2690,3220 v1(2780,3220)
I2S2_CLK: R40.1 U2.47 | length 1189.1
  Top Layer w8: U2.47 2347.52,2972.52 2380,3005 2515,3005 v1(2585,2935)
  Bottom Layer w8: R40.1 2553.12,2108.07 2553.12,2903.12 v1(2585,2935)
I2S2_SD: R31.1@2630,1856.54 U2.54 | length 1127.1
  Top Layer w8: U2.54 2417.83,2784.68 2398.15,2765 2398.15,2686.85 2445,2640 v1(2445,2615) ; v1(2535,1934.61) 2535,1905 2583.46,1856.54 R31.1@2630,1856.54
  Bottom Layer w8: v1(2445,2615) 2445,2030 2540.39,1934.61 v1(2535,1934.61)
I2S2_SEL: MK1.4 R38.2 U2.96 | length 2422.6
  Top Layer w10: MK1.4 2735,2075 v1(2735,2110) ; v1(2880,2580) 2895,2565 3185,2565 3245,2625 3245,3463.5 3233.33,3475.18 3165.18,3475.18 2997.17,3307.17 U2.96
  Bottom Layer w10: v1(2735,2110) 2735,2120 2705,2150 2624.8,2150 2580,2194.8 2580,2280 v1(2880,2580)
LED_A: R35.2 U2.59 | length 115.4
  Top Layer w8: R35.2 2490,2771.5 2516.26,2797.76 U2.59
LED_ACT: J2.3 R4.1 U1.26 | length 1199.3
  Top Layer w8: U1.26 3763.43,3440.32 v1(3783.11,3460) ; J2.3 R4.1
  Bottom Layer w8: v1(3783.11,3460) 3833.11,3510 4320.71,3510 4330,3500.71 4330,3445 4280,3395 4280,3200.32 J2.3
LED_G: R36.2 U2.60 | length 221.4
  Top Layer w8: U2.60 2535.94,2784.06 2560,2760 2592.96,2760 2633.5,2719.46 2633.5,2690 R36.2
LED_LINK: J2.4 R7.1 U1.28 | length 1370.6
  Top Layer w8: v1(3695,3580) 3695,3475 3724.06,3445.94 U1.28 ; J2.4 4348.82,3267.72 R7.1
  Bottom Layer w8: v1(3695,3580) 3700,3585 4315,3585 4380,3520 4380,3298.9 J2.4
MII_COL: R15.1 U2.26 | length 576.1
  Top Layer w8: U2.26 2252.09,3423.69 2252.09,3867.09 2267.44,3882.44 R15.1
MII_CRS: R13.1 U2.23 | length 925.4
  Top Layer w8: U2.23 2398.15,3366.85 2420,3345 v1(2831.22,3345) ; v1(3165,3325) 3215.55,3325 R13.1
  Bottom Layer w8: v1(2831.22,3345) 2850,3326.22 3163.78,3326.22 v1(3165,3325)
MII_INT: R37.1 U2.53 | length 2246.7
  Top Layer w8: v1(2350,2300) 2512.59,2300 2526.59,2286 3368,2286 3433.96,2351.96 3433.96,2362.5 v1(3445,2362.5) ; v1(2365,2642.44) 2365,2770 2398.15,2803.15 U2.53 ; v1(3740,2700) R37.1@3740,2766.54
  Bottom Layer w8: v1@2350,2294.65 v1(2350,2300) 2365,2315 v1(2365,2642.44) ; v1(3445,2362.5) 3445,2425.41 3719.59,2700 v1(3740,2700)
MII_MDC: U1.31 U2.16 | length 2070.3
  Top Layer w8: U2.16 2535.94,3845.94 2620,3930 v1(3102.01,3930) v1@3105,3930 ; U1.31 v1(3665,3542.48)
  Bottom Layer w8: v1(3102.01,3930) 3225,3930 3275,3880 3275,3695 3510,3460 3572.52,3460 3655,3542.48 v1(3665,3542.48)
MII_MDIO: U1.30 U2.25 | length 2115.5
  Top Layer w8: v1(2355,3700) 2358.78,3696.22 U2.25 ; v1(3330,3468.5) 3458.5,3340 3543.11,3340 3618.11,3265 3677.48,3265 3684.68,3272.2 U1.30
  Bottom Layer w8: v1(2355,3700) 2355,3705 2495,3845 3180,3845 3235,3790 3235,3555 3321.5,3468.5 v1(3330,3468.5)
MII_RX_CLK: R22.1 U2.24 | length 968.6
  Top Layer w8: U2.24 2378.46,3530.95 v1(2390,3542.48) ; v1(3170,3545) R22.1
  Bottom Layer w8: v1(2390,3542.48) 2447.48,3485 3110,3485 v1(3170,3545)
MII_RX_DV: R23.1 U2.32 | length 1014.7
  Top Layer w8: U2.32 2362.8,3267.8 2370,3275 v1(2370,3285) ; v1(3027.52,3290) 3171.57,3434.05 R23.1
  Bottom Layer w8: v1(2370,3285) 2385,3270 2800,3270 2820,3290 v1(3027.52,3290)
MII_RX_ER: R24.1 U2.88 | length 363.5
  Top Layer w10: U2.88 3189.68,3149.68 3217.44,3177.44 R24.1
MII_RXD_0: R25.1 U2.33 | length 1278
  Top Layer w8: v1(2150,3260) 2244.89,3260 2256.78,3248.11 U2.33 ; v1(3156.61,3101.22) R25.1
  Bottom Layer w8: v1(2150,3260) 2304.61,3260 2312.17,3252.44 3005.39,3252.44 v1(3156.61,3101.22)
MII_RXD_1: R26.1 U2.34 | length 1465.7
  Top Layer w8: v1(2075,3185) 2075,3197.79 2104.21,3227 2288.54,3227 U2.34@2289.88,3228.35 ; v1(3060,3095) 3060,3096.61 3166.34,2990.28 R26.1
  Bottom Layer w8: v1(2075,3185) 2525,3185 2615,3095 v1(3060,3095)
MII_RXD_2: R27.1 U2.35 | length 1467
  Top Layer w8: v1(2090,3145) 2092.68,3145 2156.34,3208.66 U2.35 ; v1(3153.23,2879.33) R27.1
  Bottom Layer w8: v1(2090,3145) 2094,3149 2484,3149 2558,3075 2957.56,3075 v1(3153.23,2879.33)
MII_RXD_3: R28.1 U2.36 | length 1371.7
  Top Layer w8: v1(2155,3125) 2160,3125 2223.98,3188.98 U2.36@2289.88,3188.98 ; v1(3151.61,2768.39) R28.1
  Bottom Layer w8: v1(2155,3125) 2439.69,3125 2439.84,3125.16 2521,3044 2876,3044 v1(3151.61,2768.39)
MII_TX_CLK: R16.1 U2.18 | length 471.8
  Top Layer w8: R16.1 2390,3795 2496.57,3688.43 U2.18
MII_TX_EN: R17.1 U2.48 | length 506
  Top Layer w8: R17.1@2060,2692.56 2045,2707.56 2045,2943.66 2054.09,2952.76 U2.48
MII_TXD_0: R18.1 U2.51 | length 200.3
  Top Layer w8: R18.1 2358.78,2826.34 U2.51@2358.78,2844.49
MII_TXD_1: R19.1 U2.52 | length 173.2
  Top Layer w8: R19.1 2315,2747.96 2378.46,2811.43 U2.52@2378.46,2844.49
MII_TXD_2: R20.1 U2.17 | length 420.2
  Top Layer w8: U2.17 R20.1@2516.26,3875
MII_TXD_3: R21.1 U2.1 | length 1402.6
  Top Layer w8: U2.1 2870,3454.8 2879.8,3445 v1(2925,3445) ; R21.1 3670,2797.6 v1(3670,2735)
  Bottom Layer w8: v1(2925,3445) 3125,3445 3230,3340 3230,3005 3420,2815 3590,2815 v1(3670,2735)
Music_ADC: R29.2 U2.31 U4.6 | length 4337.9
  Top Layer w5: v1(1820,3204.07) 1994.07,3204.07 2077.48,3287.48 U2.31 ; v1(3465,1775) 3583.75,1893.75 3873.75,1893.75 4168.46,2188.46 R29.2 4168.46,2353.46 4195,2380 U4.6
  Bottom Layer w5: v1@1815,3204.07 1815,2889.8 1962.5,2742.3 1962.5,2332.5 2084,2211 2084,2141.36 2120.36,2105 2160,2105 2490,1775 v1(3465,1775)
Mute: J3.3 U2.4 | length 1355.9
  Top Layer w8: U2.4 2772.17,3557.17 2787.5,3572.5 3154.08,3572.5 v1(3171.57,3590) ; v1(3070,3885) 3085,3885 3149.61,3820.39 v1(3149.61,3812.01)
  Bottom Layer w8: v1(3070,3885) 3070,3895.22 3078.01,3887.22 3078.01,4259.11 J3.3 ; v1(3149.61,3812.01) 3171.57,3790.04 v1(3171.57,3590)
NetC3_2: C3.2 U1.33 X1.2 | length 672
  Top Layer w8: U1.33@3625.79,3367.4 3625.79,3388.66 3600,3414.45 3600,3669.69 3645.31,3715 X1.2 3777.01,3875.43 C3.2
NetC4_2: C4.2 U1.34 X1.1 | length 657.1
  Top Layer w8: X1.1 C4.2 ; X1.1@3412.99,3725 3422.99,3715 3537.52,3715 3585,3667.52 3585,3409.76 3606.1,3388.66 U1.34@3606.1,3367.4
NetC5_1: C5.1 C6.2 C7.2 C8.2 U1.18 U1.23 U1.37 | length 1106.5
  Top Layer w8: U1.37 3543.35,3313.27 3605.53,3251.08 3741.08,3251.08 3783.58,3293.58 U1.23 ; U1.18 3900.16,3195.16 v1(3910,3205) ; U1.23@3837.4,3293.58 3873.58,3293.58 3897.5,3317.5 v1(3912.5,3317.5)
  Bottom Layer w8: v1(3910,3205) 3910,3315 v1(3912.5,3317.5) 3980,3385 C5.1 4034.65,3479.49 C8.2 C7.2 C6.2
NetC17_2: C17.2 C18.2 U2.49 U2.73 | length 851.8
  Top Layer w8: U2.49 2348.15,2933.15 2380,2965 v1(2475,2965) ; U2.73 2791.85,2803.15 v1(2810,2785)
  Bottom Layer w8: v1(2475,2965) 2685,2965 2755,2895 2755,2798.78 C17.2 ; v1(2810,2785) 2811.22,2783.78 C17.2 ; C18.2 C17.2
NetC24_2: C24.2 C26.1 PS1.3 U3.3 | length 1015.3
  Top Layer w20: PS1.3 3810,2480 3810,2208.78 3783.11,2181.89 v1(3783.11,1964.73)
  Bottom Layer w8: U3.3 U3.3@3795.91,2086.5 ; C26.1@3830.16,2450 C26.1
  Bottom Layer w10: PS1.3 3734.37,2450 C26.1@3830.16,2450
  Bottom Layer w20: v1(3783.11,1964.73) 3783.11,2073.7 U3.3 ; U3.3@3795.91,2086.5 C24.2
NetD1_A: D1.A R35.1 | length 65
  Top Layer w8: R35.1@2490,2675 2552.56,2675 D1.A
NetD2_A: D2.A R36.1 | length 99.5
  Top Layer w8: D2.A 2691.5,2617.83 R36.1
NetD3_A: D3.A R39.1 | length 180
  Top Layer w8: D3.A 3470,1870.79 v1(3470,1956.93)
  Bottom Layer w8: v1(3470,1956.93) 3475,1961.93 R39.1
NetJ4_1: J4.1 U2.58 | length 1354.8
  Top Layer w8: v1(2470,2790) 2483.86,2790 2496.57,2802.72 U2.58
  Bottom Layer w8: v1(2470,2790) 2470,2640 2485,2625 2485,2035 2585,1935 2916.1,1935 J4.1
NetMK1_0: MK1.1 R31.2@2630,1923.46 | length 116.2
  Top Layer w8: R31.2@2630,1923.46 2630,1978.07 2640,1988.07 MK1.1
NetMK1_2: MK1.3 R40.2 | length 107.3
  Top Layer w8: v1(2665,2100) 2687.44,2077.56 MK1.3
  Bottom Layer w8: R40.2 v1(2665,2100)
NetR3_1: R3.1 R37.2 U1.7 | length 232.5
  Top Layer w8: U1.7 3684.68,2985.32 3741.08,2928.92 R37.2
NetR5_1: R5.1 U1.27 | length 157.1
  Top Layer w8: U1.27 3743.9,3367.56 R5.1@3743.9,3524.41
NetR8_1: R8.1 U1.24 | length 193.4
  Top Layer w8: U1.24 3838.33,3314.35 3838.33,3468.5 3845,3475.18 R8.1
NetR9_1: R9.1 U1.20 | length 230.4
  Top Layer w8: U1.20@3837.4,3234.53 3925.47,3234.53 3935,3225 4030.47,3225 4040,3234.53 R9.1
NetR10_1: R10.1 U1.21 | length 145.4
  Top Layer w8: U1.21@3837.4,3254.21 3837.6,3254.41 3867.65,3254.41 3870.98,3251.08 3976.67,3251.08 R10.1
NetR11_1: R11.1 U2.94 | length 217.6
  Top Layer w8: U2.94 2979.92,3267.8 3007.72,3240 3091.22,3240 3091.22,3246.22 R11.1
NetR29_1: R29.1 R32.2 U4.2 | length 560.9
  Top Layer w5: U4.2 3960,2430 ; R32.2 3989.65,2546.54 3960,2516.89 3960,2430 ; R29.1 4000,2250 3960,2290 3960,2430
NetR30_2: R30.2 R32.1 R33.2 | length 231.5
  Top Layer w5: R32.1 4055,2590 4065,2580 4103.03,2580 R30.2@4136.5,2546.54 ; R30.2@4147.56,2546.54 R33.2@4245,2546.54
  Top Layer w10: R30.2@4136.5,2546.54 R30.2@4147.56,2546.54
NRST: C28.2 J5.8 R12.1 SW1.1 U2.14 | length 2051.9
  Top Layer w8: R12.1@1785,3381.5 1703.54,3381.5 SW1.1 1695,3465 1863.15,3633.15 v1(1910,3633.15) ; v1(2575.07,3605) 2585.15,3605 2585.15,3511.15 2575.32,3501.32 U2.14
  Top Layer w10: R12.1 1791.22,3397.72 C28.2
  Bottom Layer w8: J5.8 2176.92,4166.42 1900,3889.5 1900,3815 1910,3805 v1(1910,3633.15) 2536.85,3633.15 2565,3605 v1(2575.07,3605)
OSC_N: C22.2 U2.13 X2.2 | length 753.2
  Top Layer w8: U2.13 2595,3502.62 2610.2,3517.82 ccw(c2616.66,3531.15) 2630,3537.62 cw(c2639.9,3547.51) 2649.8,3557.41 ccw(c2656.26,3570.75) 2669.6,3577.21 cw(c2679.5,3587.11) 2689.4,3597.01 ccw(c2695.86,3610.35) 2709.2,3616.81 2727.99,3635.61 X2.2 2665,3680 2665,3796.26 2685,3812.01 2699.4,3812.01 ccw(c2699.4,3821.61) 2709,3821.61 cw(c2718.6,3821.61) 2718.6,3831.21 2747.4,3831.21 cw(c2747.4,3821.61) 2757,3821.61 ccw(c2766.6,3821.61) 2766.6,3812.01 2780,3812.01 2870.55,3812.01 C22.2
OSC_P: C23.2 U2.12 X2.1 | length 751.7
  Top Layer w8: U2.12 2614.68,3489.83 2736.35,3611.5 2966.5,3611.5 3056.28,3701.28 3056.28,3680 3045.64,3690.64 3027.56,3708.72 3027.56,3805 C23.2@3032.56,3810 ; X2.1@3079.78,3680 X2.1
PB_Next: J2.5 U2.67 | length 3262.1
  Top Layer w8: U2.67 2673.74,2771.26 2686.5,2758.5 v1(2686.5,2735) ; v1(3100,2705) 3100,2652.44 v1(3115,2637.44) ; J2.5 4409.61,3349.61 v1(4430,3370)
  Bottom Layer w8: v1(2686.5,2735) 2756.1,2735 2776.1,2715 3090,2715 v1(3100,2705) ; v1(3115,2637.44) 3115,2405 3195,2325 4275,2325 4430,2480 v1(4430,3370)
PB_PP: J1.10 U2.95 | length 1962.9
  Top Layer w8: v1(2084,2785) 2084,2794 2100,2810 v1(2210,2810) ; v1(2772.17,3020) 2610,3020 2510,3120 2510,3214.53 2582.13,3286.66 U2.95@2900.12,3286.66
  Bottom Layer w8: J1.10 2033.11,2785 v1(2084,2785) ; v1(2210,2810) 2235,2835 2395,2835 2395,2955 2460,3020 v1(2772.17,3020)
PB_PREV: J1.3 U2.55 | length 1948.9
  Top Layer w8: v1(1920,2972.44) 1920,3101.1 J1.3 J1.3@1968.5,3156.1 ; v1(1985,2665) 2018.86,2698.86 2016.78,2700.94 v1(2016.78,2884.42) ; v1(2065,2285) 2080,2285 2115,2250 v1(2345,2250) ; v1(2435,2725) 2437.52,2727.52 U2.55
  Bottom Layer w8: v1(1985,2665) 2065,2585 v1(2065,2285) ; v1(2016.78,2884.42) 2014.45,2884.42 1991.43,2907.44 1962.59,2907.44 1920.02,2950 v1(1920,2972.44) ; v1(2345,2250) 2348.5,2250 2398.15,2299.65 2398.15,2658.15 2435,2695 v1(2435,2725) ; v1(1920,2972.44) 1920.02,2978.84 1926.42,2972.44 v1(1920,2972.44)
PWM_HIGH: J4.5 U2.44 | length 2457.3
  Top Layer w8: v1(2120,3033.66) 2122.09,3031.57 U2.44
  Bottom Layer w8: v1(2120,3033.66) 2145,3008.66 2145,2163.94 2483.94,1825 3201.1,1825 J4.5
PWM_LOW: J4.3 U2.40 | length 2146.4
  Top Layer w8: v1(2205,3098.11) 2217.2,3110.31 U2.40
  Bottom Layer w8: v1(2205,3098.11) 2205,3020 2186,3001 2186,2219 2530,1875 3098.11,1875 3149.61,1926.5 J4.3
PWM_MID: J4.4 U2.42 | length 2297.8
  Top Layer w8: v1(2165,3065) 2170.94,3070.94 U2.42
  Bottom Layer w8: v1@2162.5,3065 2162.5,2192.5 2505,1850 3165,1850 3249.61,1934.61 J4.4
RD_N: J2.1 R1.2 U1.13 | length 576.9
  Top Layer w10: U1.13 3865,3096.73 3870,3091.73 3938.27,3091.73 4071.22,2958.78 4183.78,2958.78 4214.14,2989.14 4252.51,2989.14 4285.65,2956.01 J2.1@4330.71,2956.01
RD_P: J2.2 R2.2 U1.14 | length 573.6
  Top Layer w8: J2.2@4330.71,3030.71 J2.2
  Top Layer w10: U1.14 3941.87,3116.42 4049.14,3009.14 4290.25,3009.14 J2.2
RX_CLK: R22.2 U1.38 | length 428.5
  Top Layer w8: R22.2 3272.56,3511.89 3300,3484.45 3300,3373.58 3380,3293.58 U1.38 U1.38@3512.6,3293.58
RX_DV: R23.2 U1.39 | length 342.5
  Top Layer w8: R23.2 3272.56,3372.44 3371.1,3273.9 U1.39@3512.6,3273.9
RX_ER: R24.2 U1.41 | length 249.3
  Top Layer w8: R24.2 3307.64,3212.17 3330,3234.53 U1.41@3512.6,3234.53
RXD0: R25.2 U1.43 | length 278.9
  Top Layer w8: R25.2 3321.22,3101.22 3415.16,3195.16 U1.43 U1.43@3512.6,3195.16
RXD1: R26.2 U1.44 | length 343.1
  Top Layer w8: R26.2 3295.28,2990.28 3335,3030 3335,3075 3435.47,3175.47 U1.44 U1.44@3512.6,3175.47
RXD2: R27.2 U1.45 | length 501
  Top Layer w8: R27.2 3424.33,2879.33 3430,2885 3430,3135 3450.79,3155.79 U1.45 U1.45@3512.6,3155.79
RXD3: R28.2 U1.46 | length 554.4
  Top Layer w8: R28.2 3380,2768.39 3465,2853.39 3465,3130 3471.1,3136.1 U1.46 U1.46@3512.6,3136.1
SWCLK: J5.11 U2.76 | length 1596.9
  Top Layer w8: v1(2325,3665) 2325,3623.15 2343,3605.15 2343,3401.68 2485,3259.68 2485,3106.26 2595.26,2996 2739,2996 2821.54,2913.46 U2.76
  Bottom Layer w8: J5.11 2018.58,3950 2095,3950 2325,3720 2325,3675 2315,3665 v1(2325,3665)
SWDIO: J5.9 U2.72 | length 1585.6
  Top Layer w8: v1(2293.6,3820) 2293.6,3591.4 2330,3555 2330,3390.86 2448.34,3272.52 2448.34,3106.66 2580,2975 2715,2975 2772.17,2917.83 U2.72
  Bottom Layer w8: J5.9 2190.71,4060.71 2190.71,3922.89 v1(2293.6,3820)
TD_N: J2.7 R6.2 U1.16 | length 462.5
  Top Layer w8: U1.16@3837.4,3155.79 3935.02,3155.79 3951.28,3139.53 4034.53,3139.53 4055,3160 4055,3188.79 4071.21,3205 4115,3205 4159.61,3249.61 J2.7
TD_P: J2.6 R14.2 U1.17 | length 511.6
  Top Layer w8: U1.17@3837.4,3175.47 3940.81,3175.47 3955.47,3160.81 4016.47,3160.81 4017.3,3159.98 ; 4016.54,3159.21 4017.3,3159.98 ; 4020.86,3156.41 4017.3,3159.98 ; J2.6@4230.71,3339.29 J2.6 4200.82,3349.61 4097.37,3246.16 4091.16,3246.16 4040,3195 4040,3166.21 4033.76,3159.98 4017.3,3159.98
TX_CLK: R16.2 U1.1 | length 2322
  Top Layer w8: R16.2 2390,3975 2415,4000 3155,4000 3245,3910 3245,3619.04 3346.54,3517.5 3347.5,3517.5 v1(3415,3450) ; v1(3530,2857.56) 3566.73,2894.29 U1.1@3566.73,3042.6
  Bottom Layer w8: v1(3415,3450) 3425,3450 3535.79,3339.21 3535.79,2863.35 v1(3530,2857.56)
TX_EN: R17.2 U1.2 | length 1996.8
  Top Layer w8: R17.2@2060,2637.44 2060,2605 2165,2500 v1(3290,2500) ; v1(3440,2613.46) 3443.46,2613.46 3586.42,2756.42 U1.2@3586.42,3042.6
  Bottom Layer w8: v1(3290,2500) 3330,2500 3440,2610 v1(3440,2613.46)
TXD0: R18.2 U1.3 | length 1904.5
  Top Layer w8: R18.2 2230,2580 2285,2525 3438,2525 3450,2513 v1(3450,2516.89) ; v1(3565,2665) 3606.1,2706.1 U1.3@3606.1,3042.6
  Bottom Layer w8: v1(3450,2516.89) 3450,2550 v1(3565,2665)
TXD1: R19.2 U1.4 | length 1786.2
  Top Layer w8: R19.2 2315,2605 2375,2545 3481.57,2545 3625.79,2689.21 U1.4@3625.79,3042.6
TXD2: R20.2 U1.5 | length 1789
  Top Layer w8: R20.2 2516.26,3961.26 2530,3975 3105,3975 v1(3185,3895) ; v1(3645,3135) 3645,3042.91 U1.5
  Bottom Layer w8: v1(3185,3895) 3255,3825 3255,3670 3330,3595 3355,3595 3555,3395 3555,3225 v1(3645,3135)
TXD3: R21.2 U1.6 | length 185.1
  Top Layer w8: U1.6 3665,2857.72 R21.2
UART_RX: J5.4 U2.87 | length 4247
  Top Layer w8: v1(1720,3625) 1875,3780 1875,3910 2040,4075 2110,4075 2160,4025 J5.4 ; v1(1908.51,2355.5) 1910.07,2357.06 1974.56,2357.06 1995.62,2336 3029,2336 3035,2330 3035,2335 3045,2325 v1(3035,2325) ; U2.87 2990,3130 3035,3085 3035,2665 3055,2645 3055,2595 v1(3050,2595)
  Bottom Layer w8: v1(1720,3625) 1720,2895.18 1877.64,2737.54 1877.64,2377.36 1899.5,2355.5 v1(1908.51,2355.5) ; v1(3035,2325) 3045,2325 3049.61,2594.61 v1(3050,2595)
UART_TX: J5.5 U2.86 | length 4170.2
  Top Layer w8: v1(1932.65,2440.16) 1929.84,2440.16 2010,2360 v1(3005,2360) ; v1(2104.18,4222.08) 2102.92,4222.08 2225.75,4099.25 J5.5 ; U2.86 2969.96,3110.31 3015,3065.28 v1(3015,2627.52)
  Bottom Layer w8: v1(1932.65,2440.16) 1932.65,2752.35 1791,2894 1791,3741.41 1826.16,3776.57 1826.16,3936.16 2104.18,4214.18 v1(2104.18,4222.08) ; v1(3005,2360) 3010,2360 3015,2365 v1(3015,2627.52)
uDAC_OUT: J3.10 U2.29 | length 2253.9
  Top Layer w5: v1(1845,3498.11) 1921.89,3498.11 2093.15,3326.85 U2.29
  Bottom Layer w5: v1(1845,3498.11) 1845,3920 2322.05,4397.05 2915.94,4397.05 J3.10
VGND: R31.1@4400,2466.54 R34.2 U4.3 | length 466.7
  Top Layer w10: U4.3 4140,2380 4165,2405 4391.54,2405 R34.2 4400,2466.54 4400,2471.54 R31.1@4416.54,2455
pads on no net: J3.4 J3.5 J3.6 J3.7 J4.2 J5.2 J5.3 J5.6 J5.7 U1.8 U1.9 U1.10 U1.11 U1.12 U1.25 U2.5 U2.7 U2.8 U2.9 U2.37 U2.38 U2.39 U2.41 U2.43 U2.45 U2.46 U2.56 U2.57 U2.61 U2.62 U2.63 U2.64 U2.65 U2.66 U2.68 U2.77 U2.78 U2.79 U2.80 U2.81 U2.82 U2.83 U2.84 U2.85 U2.89 U2.90 U2.91 U2.97 U2.98 U4.1 U4.5 U4.8
copper on no net: | length 9894.8